# Altium PCB smarthalo_BRAIN_no_usb.PcbDoc
Units mil, origin at the board's own origin, x right, y up, seen from the top; angles counter-clockwise.
Board outline 2462 x 2461.7 mil, 2 copper layers (Top, Bottom), stack 61.902 mil thick; 84 components, 74 nets, 306 pads, 79 vias.
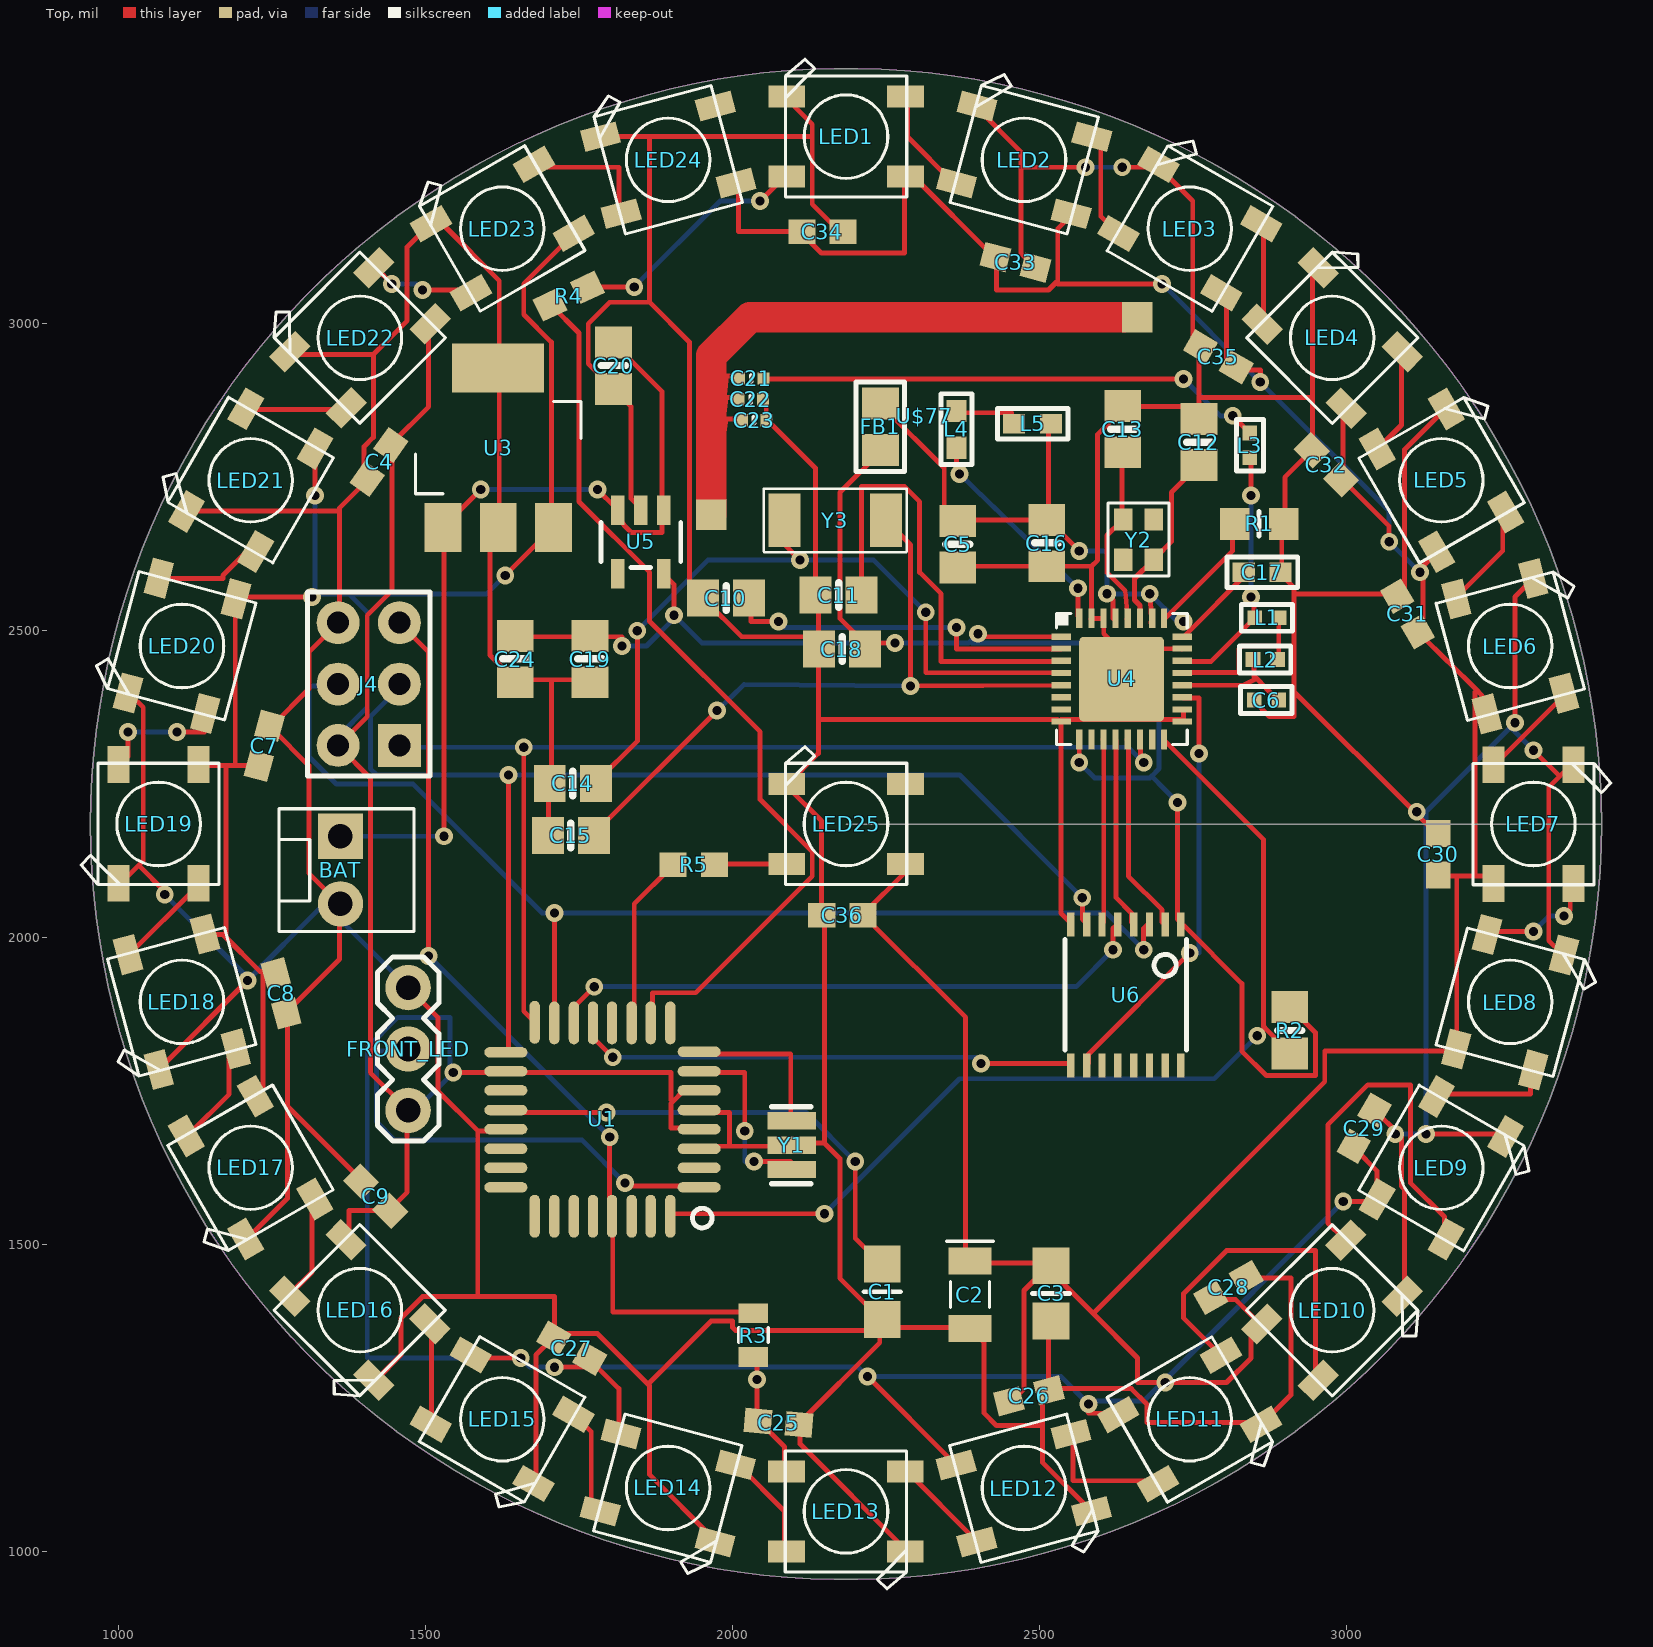
[diagram p0: Top view]
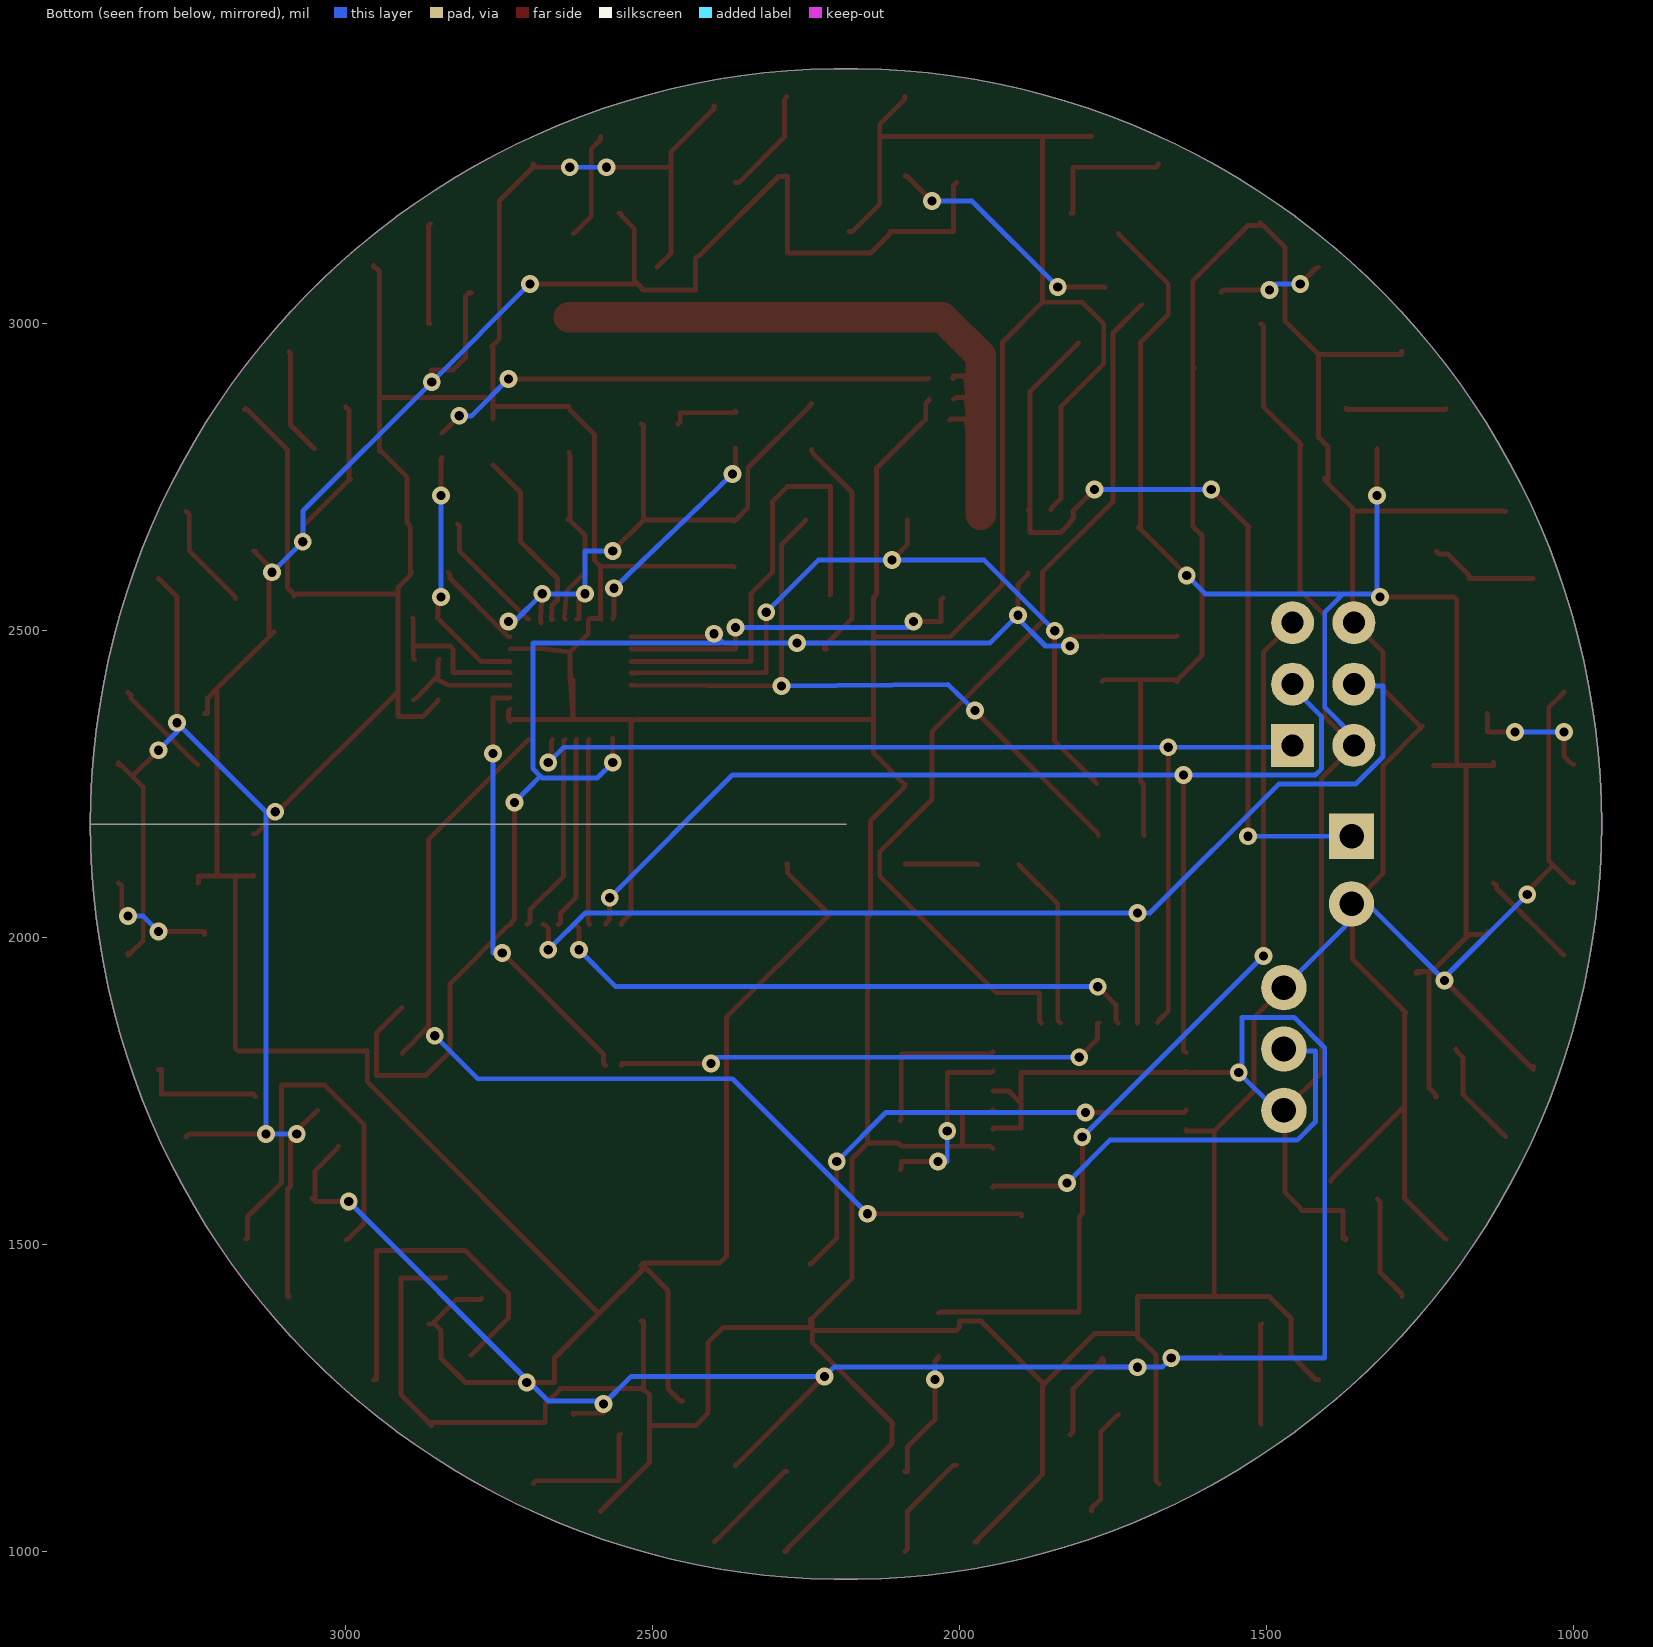
[diagram p1: Bottom view, seen from below]

## Layer stack, top to bottom
Top Solder: solder mask 0.4, Solder Resist, Dk 3.5
Top: signal copper 1.4016
Dielectric 1: core 59.0984, FR-4, Dk 4.8
Bottom: signal copper 1.4016
Bottom Solder: solder mask 0.4, Solder Resist, Dk 3.5

## Board outline
3416,2185 ccw(c2185,2185) 954,2185 ccw(c2185,2185) 2185,2185

## Design rules (kind name [scope] priority, off if disabled: settings)
Clearance mdViaVia [IsVia vs IsVia] p1: gap=6
Clearance mdPadVia [IsPad vs IsVia] p2: gap=6
Clearance mdPadPad [IsPad vs IsPad] p3: gap=6
Clearance mdWireVia [(InLayerClass('Signal Layers') AND IsTrack) vs IsVia] p4: gap=6
Clearance mdWirePad [(InLayerClass('Signal Layers') AND IsTrack) vs IsPad] p5: gap=6
Clearance mdWireWire [(InLayerClass('Signal Layers') AND IsTrack) vs (InLayerClass('Signal Layers') AND IsTrack)] p6: gap=6
Clearance [All] p7: gap=6
HoleSize [All] p1: absolutevalues=TRUE maxlimit=100000 minlimit=15 maxpercent=80.000 minpercent=20.000
HoleToHoleClearance [All] p1: gap=8 allowstackedmicrovias=TRUE
PolygonConnect ThermalVias [IsVia] p1: connectstyle=Direct reliefconductorwidth=10 reliefentries=4 polygonreliefangle="90 Angle" airgapwidth=10
PolygonConnect [All] p2: connectstyle=Relief reliefconductorwidth=10 reliefentries=4 polygonreliefangle="90 Angle" airgapwidth=10
RoutingVias [All] p1: holewidth=28 width=50 viastyle="Through Hole" minholewidth=28 minwidth=50 maxholewidth=28 maxwidth=50
SilkToSilkClearance [All] p1 off: silktosilkclearance=10
SilkToSolderMaskClearance [IsPad] p1 off: minsilkscreentomaskgap=10 clearancetoexposedcopper=TRUE
SolderMaskExpansion [All] p1: expansion=3
Width [All] p1: maxlimit=100000 minlimit=8 preferedwidth=10
26 further rules are at their usual default settings.

## Components (designator, comment, footprint, x,y, rotation, side; value= is the part's Value field where it differs from the comment)
BAT "" MOLEX-1X2_LOCK 1361.38,2159.8 r270 top
C1 "0.1uF" CAP0805-NP 2244,1467.91 r270 top
C2 "4.7uF" TAN-A 2387,1473.19 r270 top
C3 "0.1uF" CAP0805-NP 2519,1465.32 r270 top
C4 "" C0603 1424.37,2775 r235 top
C5 "0.1µF" 0805-NO 2367,2641 r270 top
C6 "2.2nF" _0402 2870,2387 r180 top
C7 "" C0603 1236.97,2312 r75 top
C8 "" C0603 1264.53,1909.41 r285 top
C9 "" C0603 1418.86,1578.7 r135 top
C10 "0.1uF" 0805-NO 1989.72,2553 r180 top
C11 "33nF" 0805-NO 2173.19,2558 r180 top
C12 "15pF" 0805-NO 2760,2807 r90 top
C13 "15pF" 0805-NO 2636,2828 r90 top
C14 "15pF" 0805-NO 1739.71,2251 r0 top
C15 "15pF" 0805-NO 1736.57,2166.5 r0 top
C16 "1µF" 0805-NO 2512,2643 r270 top
C17 "1nF" _0603 2863,2595 r0 top
C18 "0.1µF" 0805-NO 2178.7,2470 r180 top
C19 "10µF" 0805-NO 1768.07,2454 r270 top
C20 "10µF" 0805-NO 1806.26,2932 r270 top
C21 "1.8pF" _0402MP 2030.67,2911 r0 top
C22 "1.2pF" _0402MP 2029.88,2877 r180 top
C23 "1.5pF" _0402MP 2035.39,2843 r180 top
C24 "10µF" 0805-NO 1646.02,2454 r270 top
C25 "" C0603 2074.76,1209.41 r355 top
C26 "" C0603 2483,1253.5 r15 top
C27 "" C0603 1738.54,1330.67 r150 top
C28 "" C0603 2808,1429.88 r30 top
C29 "" C0603 3029,1688.94 r60 top
C30 "" C0603 3150,2135.39 r90 top
C31 "" C0603 3100,2527 r120 top
C32 "" C0603 2968,2770 r135 top
C33 "" C0603 2461,3100 r345 top
C34 "" C0603 2146.42,3150 r0 top
C35 "" C0603 2792,2946 r150 top
C36 "" C0603 2179.49,2036.18 r180 top
FB1 "MMZ1608B121C" 0805#1 2241,2832 r90 top
FRONT_LED "" 1X03 1471.61,1718.46 r90 top
J4 "" HEAD3X2 1457.44,2313 r90 top
L1 "8.2nH" _0402 2871,2521 r180 top
L2 "5.6nH" _0402 2868,2453 r180 top
L3 "3.9nH" _0402 2843,2802 r90 top
L4 "10µH" _0603 2365,2828 r90 top
L5 "15nH" _0603 2489,2837 r0 top
LED1 "" WS2812B 2185,3305 r0 top
LED2 "" WS2812B 2475,3267 r345 top
LED3 "" WS2812B 2745,3155 r330 top
LED4 "" WS2812B 2977,2977 r315 top
LED5 "" WS2812B 3155,2745 r300 top
LED6 "" WS2812B 3267,2475 r285 top
LED7 "" WS2812B 3305,2185 r270 top
LED8 "" WS2812B 3267,1895.12 r255 top
LED9 "" WS2812B 3155,1625 r240 top
LED10 "" WS2812B 2977,1393.04 r225 top
LED11 "" WS2812B 2745,1215.05 r210 top
LED12 "" WS2812B 2475,1103.16 r195 top
LED13 "" WS2812B 2185,1065 r180 top
LED14 "" WS2812B 1895.12,1103.16 r165 top
LED15 "" WS2812B 1625,1215.05 r150 top
LED16 "" WS2812B 1393.04,1393.04 r135 top
LED17 "" WS2812B 1215.05,1625 r120 top
LED18 "" WS2812B 1103.16,1895.12 r105 top
LED19 "" WS2812B 1065,2185 r90 top
LED20 "" WS2812B 1103.16,2475 r75 top
LED21 "" WS2812B 1215.05,2745 r60 top
LED22 "" WS2812B 1393.04,2977 r45 top
LED23 "" WS2812B 1625,3155 r30 top
LED24 "" WS2812B 1895.12,3267 r15 top
LED25 "" WS2812B 2185,2185 r0 top
R1 "22K" _0805MP 2858,2674 r0 top
R2 "10K" 0805-NO 2908,1848.56 r90 top
R3 "1k" 0805#2 2034.21,1352.72 r270 top
R4 "" 0603-NO 1733.03,3045 r25 top
R5 "" 0603-NO 1936.97,2118.86 r0 top
U1 "" QFP032 1945.77,1592.96 r90 top
U3 "UA78M05" SOT223 1528.31,2668 r0 top
U4 "" QFN32_5MM 2634,2421 r0 top
U5 "" SOT23-5 1850.75,2645 r180 top
U6 "74HC4050D" TSSOP16 2641,1906.65 r180 top
U$77 "" ANT_PCB_2.4GHZ_NRF8001_1.6MM_1OZ 1965.71,2689 r270 top
Y1 "16MHz" RESONATOR 2096.36,1661.49 r90 top
Y2 "16MHz" CRYSTAL_2.5X2 2662,2648 r90 top
Y3 "" CRYSTAL_4.9X1.8 2167.68,2680 r180 top

## Footprints (in the part's own frame and the unit in brackets; to place one, negate y for a bottom-side part, rotate by r counter-clockwise, add the part's x,y. Pads: shape width x height; smd on the part's side, far side on the other; paste and mask are expansions set on the pad)
1X03 [mil] "1X03"
  round 74 hole 40: 1(0,0) 2(100,0) 3(200,0)
  silkscreen extent -50,-50 250,50
0603-NO [mil] "0603-NO"
  rect 44x40 smd: 1(-33.46,0) 2(34,0)
0805#1 [mil] "0805"
  rect 52x60 smd: 1(-37.4,0) 2(38,0)
  silkscreen extent -73,-39 73,40
0805#2 [mil] "0805"
  rect 32x48 smd: 1(-35.43,0) 2(36,0)
  silkscreen extent -12,-24 12,24
0805-NO [mil] "0805-NO"
  rect 52x60 smd: 1(-37.4,0) 2(38,0)
  silkscreen extent 0,-20 0,20
_0402 [mil] "_0402"
  rect 24x24 smd: 1(-20,0) 2(20,0)
  silkscreen extent -42,-22 42,22
_0402MP [mil] "_0402MP"
  rect 20x20 smd: 1(-20,0) 2(20,0)
  silkscreen extent 0,-5 0,5
_0603 [mil] "_0603"
  rect 36x32 smd: 1(-30,0) 2(30,0)
  silkscreen extent -58,-25 58,25
_0805MP [mil] "_0805MP"
  rect 48x52 smd: 1(-40,0) 2(40,0)
  silkscreen extent 0,-20 0,20
ANT_PCB_2.4GHZ_NRF8001_1.6MM_1OZ [mil] "ANT_PCB_2.4GHZ_NRF8001_1.6MM_1OZ"
  rect 50x50 smd: FEED(0,0) TESTPOINT(-321.6,694)
  Top lines w50: 0,0 -259.4,0 -321.6,63 -321.6,671
C0603 [mil] "C0603"
  rect 44x40 smd: 1(-33.46,0) 2(34,0)
CAP0805-NP [mil] "CAP0805-NP"
  rect 60x60 smd: 1(0,0) 2(90,0)
  silkscreen extent 45,-30 45,30
CRYSTAL_2.5X2 [mil] "CRYSTAL_2.5X2"
  rect 36x30 smd: 1(-32.48,-24.61) 2(33,-24.61) 3(33,25) 4(-32.48,25)
  silkscreen extent -59,-49 60,50
CRYSTAL_4.9X1.8 [mil] "CRYSTAL_4.9X1.8"
  rect 52x87 smd: 1(-82.68,0) 2(83,0)
  silkscreen extent -116,-51 117,52
HEAD3X2 [mil] "HEAD3X2"
  rect 70x70 hole 36: 1(0,0)
  round 70 hole 36: 2(0,100) 3(100,0) 4(100,100) 5(200,0) 6(200,100)
  silkscreen extent -50,-50 250,150
MOLEX-1X2_LOCK [mil] "MOLEX-1X2_LOCK"
  rect 74x74 hole 40: 1(-5,0)
  round 74 hole 40: 2(105,0)
  silkscreen extent -50,-100 150,120
QFN32_5MM [mil] "QFN32_5MM"
  rect 32x10 smd: 1(-98.43,69) 2(-98.43,50) 3(-98.43,30) 4(-98.43,10) 5(-98.43,-9.84) 6(-98.43,-29.53) 7(-98.43,-49.21) 8(-98.43,-68.9) 17(99,-68.9) 18(99,-49.21) 19(99,-29.53) 20(99,-9.84) 21(99,10) 22(99,30) 23(99,50) 24(99,69)
  rect 10x32 smd: 9(-68.9,-98.43) 10(-49.21,-98.43) 11(-29.53,-98.43) 12(-9.84,-98.43) 13(10,-98.43) 14(30,-98.43) 15(50,-98.43) 16(69,-98.43) 25(69,99) 26(50,99) 27(30,99) 28(10,99) 29(-9.84,99) 30(-29.53,99) 31(-49.21,99) 32(-68.9,99)
  rrect10% 138x138 smd: 33(0,0)
  silkscreen extent -106,-106 107,107
QFP032 [mil] "QFP032"
  rrect100% 17x70 smd: 1(0,0) 2(32,0) 3(63,0) 4(95,0) 5(126,0) 6(158,0) 7(189,0) 8(221,0) 17(220,315) 18(189,315) 19(158,315) 20(126,315) 21(95,315) 22(63,315) 23(32,315) 24(0,315)
  rrect100% 70x17 smd: 9(268,47) 10(268,79) 11(268,110) 12(268,142) 13(268,173) 14(268,204) 15(268,236) 16(269,268) 25(-47,268) 26(-47,236) 27(-47,204) 28(-47,173) 29(-47,142) 30(-47,110) 31(-47,79) 32(-47,47)
  silkscreen extent -66,-21 -34,11
RESONATOR [mil] "RESONATOR"
  rect 28x79 smd: 1(-39.37,0) 2(0,0) 3(40,0)
  silkscreen extent -63,-31 63,32
SOT23-5 [mil] "SOT23-5"
  rect 22x48 smd: 1(-37.4,-51.18) 2(0,-51.18) 3(38,-51.18) 4(38,52) 5(-37.4,52)
  silkscreen extent -65,-31 65,42
SOT223 [mil] "SOT223"
  rect 60x80 smd: 1(0,0) 2(90,0) 3(180,0)
  rect 150x80 smd: 4(90,260)
  silkscreen extent -45,55 225,205
TAN-A [mil] "TAN-A"
  rect 44x70 smd: 1(0,0) 2(110,0)
  silkscreen extent -32,-38 76,38
TSSOP16 [mil] "TSSOP16"
  rect 12x39 smd: 1(-89.57,-114.87) 2(-63.98,-114.87) 3(-38.39,-114.87) 4(-12.8,-114.87) 5(13,-114.87) 6(39,-114.87) 7(64,-114.87) 8(90,-114.87) 9(90,115) 10(64,115) 11(39,115) 12(13,115) 13(-12.8,115) 14(-38.39,115) 15(-63.98,115) 16(-89.57,115)
  silkscreen extent -99,-90 99,90
WS2812B [mil] "WS2812B"
  rect 60x36 smd: 1-VDD(97,-64.96) 2-DOUT(97,65) 3-GND(-96.46,65) 4-DIN(-96.46,-64.96)
  silkscreen extent -98,-98 99,126

## Part data
BAT: library part MOLEX-1X2_LOCK
C1 C3: library part CAP0805-NP
C2: library part TAN-A
C4 C7 C8 C9 C25 C26 C27 C28 C29 C30 C31 C32 C33 C34 C35 C36: library part C0603
C5 C10 C11 C12 C13 C14 C15 C16 C18 C19 C20 C24 R2: library part 0805-NO
C6 L1 L2 L3: library part _0402
C17 L4 L5: library part _0603
C21 C22 C23: library part _0402MP
FB1 R3: library part 0805
FRONT_LED: library part 1X03
J4: library part HEAD3X2
LED1 LED2 LED3 LED4 LED5 LED6 LED7 LED8 LED9 LED10 LED11 LED12 LED13 LED14 LED15 LED16 LED17 LED18 LED19 LED20 LED21 LED22 LED23 LED24 LED25: library part WS2812B
R1: library part _0805MP
R4 R5: library part 0603-NO
U1: library part QFP032
U3: library part SOT223
U4: library part QFN32_5MM
U5: library part SOT23-5
U6: library part TSSOP16
U$77: library part ANT_PCB_2.4GHZ_NRF8001_1.6MM_1OZ
Y1: library part RESONATOR
Y2: library part CRYSTAL_2.5X2
Y3: library part CRYSTAL_4.9X1.8

## Via types
v1: diameter 29/29 (per signal layer), hole 15, Top to Bottom, 79 vias

## Nets (pads, with @x,y where several pads share a name; then routed paths per layer and width w, separated by ;. In a path a pad name is that pad's centre, name@x,y a point inside that pad or via, vN(x,y) a via of type N, cw(c..) or ccw(c..) an arc to the next point about the centre after c; other vN are vias at no path point)
+5V: C2.1 C3.1 C4.1 C7.1 C8.1 C9.1 C25.1 C26.1 C27.1 C28.1 C29.1 C30.1 C31.1 C32.1 C33.1 C34.1 C35.1 C36.1 FRONT_LED.1 J4.2 LED1.1-VDD LED2.1-VDD LED3.1-VDD LED4.1-VDD LED5.1-VDD LED6.1-VDD LED7.1-VDD LED8.1-VDD LED9.1-VDD LED10.1-VDD LED11.1-VDD LED12.1-VDD LED13.1-VDD LED14.1-VDD LED15.1-VDD LED16.1-VDD LED17.1-VDD LED18.1-VDD LED19.1-VDD LED20.1-VDD LED21.1-VDD LED22.1-VDD LED23.1-VDD LED24.1-VDD LED25.1-VDD R3.2 U1.4 U1.6 U1.18 U3.3 | length 14313.8
  Top w8: LED19.1-VDD@1130,2285 LED19.1-VDD 1130,2280 1175,2280 ; LED18.1-VDD@1140,2010 1140.95,2005.11 1145,2005 1170,2005 1172.5,2002.5 ; LED17.1-VDD@1225,1740 1223.08,1741.01 1225,1745 1235,1755 C8.1@1235,1945 ; C7.1@1228.31,2280 1225,2280 1190,2280 ; v1(1315,2555) 1195,2555 1190.88,2552 1190,2550 1190,2280 ; LED21.1-VDD@1319.54,2797 1320,2795 v1(1320,2720) ; LED16.1-VDD@1370,1510 1370.77,1507.18 1375,1510 1375,1555 1440,1555 C9.1 1445,1560 1470,1585 1470,1715 FRONT_LED.1 1470,1720 1410,1780 1410,2260 1360,2310 J4.2 1360,2315 1405,2360 1405,2525 1445,2565 1445,2800 1443.56,2803 1445,2805 1505,2865 1505,2995 1507.18,3000 LED22.1-VDD@1510,3000 ; v1(1545,1780) 1630,1780 1630.93,1781.86 1635,1780 1900,1780 1900,1735 1902.5,1732.5 ; LED15.1-VDD@1575,1320 1573.95,1319.54 1575,1315 v1(1655,1315) ; v1(1630,2590) 1705,2665 U3.3 1705,2670 1705,2970 1660,3015 1660,3065 1740,3145 LED23.1-VDD@1741.01,3147 ; v1(1710,1300) 1765,1300 1765,1310 C27.1 1770,1310 1815,1265 1815,1195 1818.77,1190.88 LED14.1-VDD@1820,1190 ; U1.4@1945.77,1687.4 1945,1690 1900,1690 1900,1730 1902.5,1732.5 ; U1.6@1945.77,1750.38 1945,1750 1920,1750 1902.5,1732.5 ; LED24.1-VDD@2005,3230 2005.11,3230 2010,3225 2010,3150 2110,3150 C34.1 2115,3145 2145,3115 2280,3115 2280,3240 2282,3241 2285,3240 2295,3240 2425,3110 2429,3109 2430,3105 2430,3055 2515,3055 2528,3068 ; R3.2@2034.21,1317.28 2035,1315 2040,1310 v1(2040,1280) 2040,1215 C25.1 2045,1210 2085,1170 2085,1130 2088.54,1129.96 LED13.1-VDD@2090,1130 ; v1(2220,1285) 2360,1145 2365,1140.95 LED12.1-VDD@2365,1140 ; LED25.1-VDD 2280,2120 2280,2105 2215,2040 C36.1 2215,2035 2380,1870 2380,1480 2385,1475 C2.1 2390,1470 2515,1470 C3.1 ; C26.1@2451,1244.84 2455,1245 2475,1265 2475,1425 2515,1465 C3.1 ; LED2.1-VDD@2555,3180 2552,3180 2550,3175 2530,3155 2530,3070 2528,3068 ; v1(2580,1240) 2580,1225 2625,1225 2629,1223.08 LED11.1-VDD@2630,1225 ; v1(2700,3065) 2530,3065 2528,3068 ; C28.1 2780,1410 2820,1410 2860,1370 LED10.1-VDD@2863,1370.77 ; LED3.1-VDD@2795,3050 2797,3051 2800,3050 2805,3045 2805,2945 2820,2930 2821,2929 2825,2925 2860,2925 v1(2860,2905) ; LED10.1-VDD@2865,1370 LED10.1-VDD@2863,1370.77 ; v1(2995,1570) 3050,1570 LED9.1-VDD@3051,1573.95 ; LED4.1-VDD@3000,2865 3000,2863 2995,2860 2995,2750 2992,2746 2995,2745 3070,2670 v1(3070,2645) ; C29.1@3012,1659.96 3015,1655 3050,1620 3050,1575 LED9.1-VDD@3051,1573.95 ; LED9.1-VDD@3055,1575 LED9.1-VDD@3051,1573.95 ; v1(3120,2595) v1@3125,2595 ; C30.1 3150,2100 3180,2100 ; LED5.1-VDD@3150,2630 3147,2629 3145,2625 3125,2605 v1@3125,2595 ; LED6.1-VDD@3230,2365 3225,2365 3225,2390 3213,2403 ; LED7.1-VDD@3241,2088.54 3240,2090 3240,2100 3210,2100 ; 1172.5,2002.5 1230,1945 C8.1@1235,1945 ; 1172.5,2002.5 1175,2005 1175,2280 ; 1175,2280 1190,2280 ; C8.1@1235,1945 1255,1945 C8.1 C8.1@1235,1945 ; C3.1 2515,1460 2588,1387.5 ; 2588,1387.5 2660,1315 2660,1275 v1(2705,1275) 2805,1275 2845,1315 2845,1360 2855,1370 LED10.1-VDD@2863,1370.77 ; 2588,1387.5 2965,1765 2965,1815 3175,1815 3180,1818.77 3180,1820 3180,2100 ; v1@3125,2595 3125,2495 3117,2498 3120,2495 3213,2403 ; 3180,2100 3210,2100 ; 3210,2100 3210,2400 3213,2403
  Bottom w8: v1(1315,2555) v1@1320,2560 ; v1(1320,2720) v1@1320,2560 ; J4.2 1360,2315 1360,2330 1405,2375 1405,2530 1377.5,2558 ; FRONT_LED.1 1475,1720 1485,1720 v1(1545,1780) 1540,1780 1540,1870 1455,1870 1405,1820 1405,1315 v1(1655,1315) 1670,1300 v1(1710,1300) 2040,1300 ; v1(1630,2590) 1600,2560 1380,2560 1377.5,2558 ; v1(2040,1280) 2040,1300 ; v1(2700,3065) v1(2860,2905) 3070,2695 v1(3070,2645) v1(3120,2595) ; v1(2705,1275) v1@2703,1277.5 ; v1(2995,1570) v1@2703,1277.5 ; v1@1320,2560 1375,2560 1377.5,2558 ; 2040,1300 2205,1300 v1(2220,1285) 2535,1285 v1(2580,1240) 2580,1245 2670,1245 v1@2703,1277.5
A0: U1.23
A1: U1.24
A2: U1.25
A3: U1.26
A4: U1.27
A5: U1.28
A6: U1.19
A7: U1.22
ACTIVE: U4.6
AREF: C1.1 U1.20 | length 789.8
  Top w8: U1.20@1630.93,1718.89 1635,1715 v1(1795,1715) ; v1(2200,1635) 2200,1510 2240,1470 C1.1
  Bottom w8: v1(1795,1715) 2120,1715 v1(2200,1635)
AVDD: C5.1 C16.1 C17.1 FB1.2 L5.2 U4.24 U4.26 U4.29 | length 1144.1
  Top w8: FB1.2 2245,2865 2345,2765 2345,2700 2365,2680 2367,2678 2370,2680 2510,2680 C16.1@2512,2681 ; L5.2 2515,2835 2515,2685 C16.1@2512,2681 ; v1(2565,2630) 2515,2680 C16.1@2512,2681 ; v1(2610,2560) 2620,2550 2620,2520 U4.29@2624,2519 ; v1(2680,2560) 2683,2520 2683,2519 U4.26@2682,2512 ; U4.24@2732,2490 2735,2490 2748,2503 ; v1(2735,2515) 2748,2503 ; C17.1 2830,2590 2830,2585 2748,2503
  Bottom w8: v1(2565,2630) 2610,2630 v1(2610,2560) v1(2680,2560) 2725,2515 v1(2735,2515)
CALL: U1.9
D4: U1.2
D7: R5.1 U1.11 | length 285.9
  Top w8: U1.11 1840,1865 1840,2055 1900,2115 R5.1
D8: U1.12
FRONT_LED: FRONT_LED.2 U1.1 | length 742.4
  Top w8: v1(1825,1600) 1825,1595 1945,1595 U1.1
  Bottom w8: FRONT_LED.2 1470,1815 1420,1815 1420,1700 1450,1670 1755,1670 v1(1825,1600)
GND: BAT.2 C1.2 C2.2 C3.2 C4.2 C5.2 C6.2 C7.2 C8.2 C9.2 C10.2 C11.2 C12.2 C13.2 C14.1 C15.1 C16.2 C17.2 C18.2 C19.2 C20.2 C22.1 C23.1 C24.2 C25.2 C26.2 C27.2 C28.2 C29.2 C30.2 C31.2 C32.2 C33.2 C34.2 C35.2 C36.2 FRONT_LED.3 J4.6 LED1.3-GND LED2.3-GND LED3.3-GND LED4.3-GND LED5.3-GND LED6.3-GND LED7.3-GND LED8.3-GND LED9.3-GND LED10.3-GND LED11.3-GND LED12.3-GND LED13.3-GND LED14.3-GND LED15.3-GND LED16.3-GND LED17.3-GND LED18.3-GND LED19.3-GND LED20.3-GND LED21.3-GND LED22.3-GND LED23.3-GND LED24.3-GND LED25.3-GND R1.2 U1.3 U1.5 U1.21 U3.2 U3.4 U4.8 U4.17 U4.18 U4.23 U4.30 U4.31 U4.33 U5.2 U6.8 Y1.2 | length 20083.1
  Top w8: LED19.3-GND@1000,2090 LED19.3-GND 1005,2090 1032.5,2117.5 ; LED20.3-GND@1015,2400 1015.45,2399 1020,2395 1040,2375 1040,2125 1032.5,2117.5 ; LED18.3-GND@1065,1790 1065.38,1785.14 1070,1790 v1(1210,1930) ; v1(1075,2070) 1075,2075 1032.5,2117.5 ; LED21.3-GND@1110.57,2694 1115,2695 1360,2695 ; LED17.3-GND 1210,1510 1275,1575 1275,1720 1277.5,1722.5 ; LED22.3-GND@1280,2955 1278.9,2955 1280,2950 1415,2950 ; C9.2@1395.2,1602.36 1395,1605 1277.5,1722.5 ; LED16.3-GND@1415,1280 LED16.3-GND 1420,1280 1460,1320 1460,1380 1495,1415 1585,1415 ; FRONT_LED.3 1475,1915 1520,1870 1520,1750 1585,1685 ; LED23.3-GND@1510,3165 LED23.3-GND@1508.99,3163 ; U1.21@1630.93,1687.4 1630,1685 1585,1685 ; LED15.3-GND@1675,1110 1676.05,1110.57 1680,1115 1680,1320 1705,1345 C27.2@1709.56,1347.4 ; C15.1 1700,2170 1700,2250 C14.1 1705,2255 1705,2420 ; C19.2@1768.07,2417 1765,2420 1705,2420 ; LED24.3-GND@1785,3305 1785.14,3305 1790,3305 1865,3305 ; U5.2@1850.75,2697 1850,2700 1835,2715 1835,2865 1810,2890 C20.2 1805,2895 1765,2935 1765,3000 1800,3035 1865,3035 ; U1.3@1945.77,1655.92 1950,1660 1995,1660 ; U1.5@1945.77,1718.89 1950,1715 1995,1715 1995,1660 ; LED14.3-GND@1975,1015 1971.48,1015.45 1970,1020 1865,1125 1865,1270 1862.5,1272.5 ; C22.1 2050,2875 2055,2870 2055,2845 C23.1 2060,2840 2135,2765 2135,2560 2135.79,2558 2140,2555 C18.2@2140,2490 ; LED1.3-GND@2090,3370 LED1.3-GND 2090,3365 2130,3325 2130,3305 ; C34.2@2179.88,3150 2175,3150 2130,3195 2130,3305 ; LED13.3-GND@2285,1000 2282,1000.04 2280,1005 2110,1175 2110,1205 2108.1,1206.49 2110,1210 2240,1340 C1.2@2240,1360 ; C5.2@2367,2604 2370,2605 2510,2605 2512,2606 2515,2605 2585,2605 ; LED2.3-GND@2400,3355 2399,3355 2400,3350 2470,3280 2470,3255 ; C33.2@2493,3092 2490,3095 2470,3115 2470,3255 ; C3.2 2515,1375 C26.2@2515,1265 ; U6.8 2550,2025 2535,2040 2535,2350 U4.8@2535,2352 ; v1(2575,3255) 2470,3255 ; U4.31@2584,2519 U4.31@2585,2520 ; LED12.3-GND@2585,1065 2585,1065.38 2580,1070 2505,1145 2505,1205 ; v1(2635,3255) 2690,3255 LED3.3-GND@2694,3260 ; LED3.3-GND@2695,3260 LED3.3-GND@2694,3260 ; U4.18@2732,2372 2735,2370 2735,2355 2732,2352 2730,2355 U4.33@2630,2355 ; U4.23@2732,2470 2683,2471 U4.33@2635,2465 ; C28.2@2837,1446.61 2840,1445 2910,1445 2910,1255 2865,1210 LED11.3-GND@2862,1207.02 ; C6.2 2850,2385 2875,2360 2915,2360 2915,2400 ; LED11.3-GND@2860,1205 LED11.3-GND@2862,1207.02 ; LED4.3-GND@2955,3095 2955,3092 2950,3090 2945,3085 2945,2880 ; C29.2@3046,1717.92 3050,1715 v1@3083,1682.5 ; v1(3080,1680) v1@3083,1682.5 ; LED10.3-GND@3095,1415 3092,1415.31 3095,1420 3095,1590 3090,1595 3090,1675 v1@3083,1682.5 ; v1(3115,2205) v1@3113,2203 ; v1(3130,1680) 3255,1680 3260,1676.05 LED9.3-GND@3260,1675 ; C30.2@3150,2168.86 3145,2170 v1@3113,2203 ; LED5.3-GND@3165,2860 3163,2862 3160,2860 3095,2795 3095,2570 3085,2560 3084,2556 3080,2560 2915,2560 ; v1(3275,2350) 3275,2555 3300,2580 LED6.3-GND@3305,2585 ; v1(3305,2305) 3348,2263 ; LED8.3-GND@3355,1975 3355,1971.48 3350,1975 3330,1995 3330,2245 3348,2263 ; LED7.3-GND@3370,2285 3370,2282 3365,2280 3348,2263 ; 1277.5,1722.5 1275,1725 1275,1875 1273.19,1877.09 1275,1880 1360,1965 1360,2050 BAT.2 1360,2055 1310,2105 1310,2280 1250,2340 1245.63,2345 1250,2345 1310,2405 1310,2465 1355,2510 J4.6 1360,2515 1360,2695 ; 1360,2695 1360,2700 1405,2745 1405.18,2748 1400,2745 1400,2800 1415,2815 1415,2950 ; 1415,2950 1470,3005 1470,3125 1505,3160 LED23.3-GND@1508.99,3163 ; LED23.3-GND@1508.99,3163 1510,3160 1530,3160 1620,3070 1620,2930 U3.4 1620,2925 1620,2670 U3.2 1615,2665 1605,2655 1605,2460 1645,2420 1646.02,2417 1650,2420 1705,2420 ; 1585,1415 1710,1415 C27.2@1710,1355 ; 1585,1415 1585,1685 ; C27.2@1709.56,1347.4 1710,1350 C27.2@1710,1355 ; C27.2@1709.56,1347.4 C27.2@1710,1355 ; C27.2@1710,1355 1780,1355 1862.5,1272.5 ; 1862.5,1272.5 1965,1375 2000,1375 2000,1365 2005,1360 C1.2@2240,1360 ; 1865,3035 1865,3305 ; 1865,3035 1930,2970 1930,2575 1950,2555 1952.32,2553 1955,2550 2015,2490 C18.2@2140,2490 ; 1865,3305 2130,3305 ; 1995,1660 2095,1660 Y1.2 2100,1665 2150,1665 ; 2140,2355 2140,2465 C18.2@2141.3,2470 ; 2140,2355 2140,2300 2090,2250 LED25.3-GND 2090,2245 2145,2190 2145,2040 2146.02,2036.18 2150,2035 2150,1665 ; 2140,2355 2530,2355 U4.8@2535,2352 ; C18.2@2140,2490 2140,2470 C18.2@2141.3,2470 ; C18.2@2140,2490 C18.2@2141.3,2470 ; 2150,1665 2175,1640 2175,1445 2240,1380 C1.2 ; C1.2@2240,1360 C1.2@2240,1365 ; C1.2@2240,1360 C1.2 ; C1.2@2240,1365 2240,1375 C1.2 ; C1.2@2240,1365 2385,1365 C2.2 2390,1360 2410,1340 2410,1225 2430,1205 2505,1205 ; C1.2@2240,1365 C1.2 ; 2505,1205 2505,1255 2510,1260 2515,1262.17 C26.2@2515,1265 ; C26.2@2515,1265 2650,1265 2675,1240 2675,1210 2860,1210 LED11.3-GND@2862,1207.02 ; U4.8@2535,2352 2535,2355 U4.33@2630,2355 ; U4.31@2585,2520 2600,2520 2604,2519 2605,2515 2605,2495 U4.33@2635,2465 ; U4.31@2585,2520 2585,2605 ; 2585,2605 2595,2615 2595,2820 2635,2860 2636,2865 2640,2865 C12.2@2760,2865 ; U4.33@2630,2355 2630,2420 U4.33 ; U4.33@2630,2355 U4.33 ; U4.33 2635,2425 U4.33@2635,2465 ; U4.33 U4.33@2635,2465 ; LED3.3-GND@2694,3260 2695,3255 2750,3200 2750,2975 2760,2965 2763,2963 2760,2960 2760,2880 ; C12.2@2760,2865 C12.2 C12.2@2760,2865 ; C12.2@2760,2865 2760,2880 ; 2760,2880 2945,2880 ; 2915,2400 2915,2560 ; 2915,2400 v1@3113,2203 ; 2915,2560 2915,2570 2895,2590 C17.2 2895,2595 2895,2670 R1.2 2900,2675 2900,2750 2940,2790 2945,2793 2945,2795 2945,2880
  Bottom w8: v1(1075,2070) 1210,1935 v1(1210,1930) 1330,2050 BAT.2@1340,2050 ; FRONT_LED.3 1470,1920 BAT.2@1340,2050 ; v1(2575,3255) v1(2635,3255) ; v1(3080,1680) v1(3130,1680) 3130,2205 ; v1(3115,2205) 3130,2205 ; v1(3305,2305) 3270,2340 v1(3275,2350) 3130,2205 ; BAT.2@1340,2050 1360,2050 BAT.2 BAT.2@1340,2050
HALO: R4.1 U1.10 | length 1497.4
  Top w8: R4.1@1702.7,3031 1705,3030 1750,2985 1750,2710 1865,2595 1865,2515 2045,2335 2045,2225 2130,2140 2130,2100 1940,1910 1870,1910 1870,1865 U1.10
MISO: J4.1 U1.16 U4.14 | length 1720.9
  Top w8: v1(1660,2310) 1660,1880 1675,1865 U1.16@1677.93,1861.29 ; U4.14@2663,2323 2665,2320 2665,2290 v1(2670,2285)
  Bottom w8: J4.1 1460,2310 v1(1660,2310) 2645,2310 v1(2670,2285)
MOSI: U4.13 U6.2 | length 327.5
  Top w8: U4.13@2643,2323 2645,2320 2645,2100 2700,2045 2700,2025 U6.2
MOSI_5V: J4.4 U1.15 U6.3 | length 1879.7
  Top w8: U1.15 1710,1865 v1(1710,2040) ; v1(2670,1980) 2670,2015 2675,2020 U6.3@2679,2021.53
  Bottom w8: J4.4 1355,2410 1310,2410 1310,2295 1355,2250 1480,2250 1690,2040 v1(1710,2040) 2610,2040 v1(2670,1980)
N$1: U1.8 Y1.3 | length 259.8
  Top w8: U1.8@1945.77,1813.34 1950,1810 2095,1810 2095,1705 Y1.3@2096.36,1700.86
N$2: U1.7 Y1.1 | length 307.8
  Top w8: U1.7@1945.77,1781.86 1950,1780 2020,1780 v1(2020,1685) ; v1(2035,1635) 2095,1635 2095,1625 Y1.1
  Bottom w8: v1(2020,1685) 2020,1635 v1(2035,1635)
N$3: LED1.2-DOUT LED2.4-DIN | length 176.9
  Top w8: LED1.2-DOUT 2285,3365 2285,3305 2360,3230 LED2.4-DIN@2365,3230
N$4: LED2.2-DOUT LED3.4-DIN | length 176.6
  Top w8: LED2.2-DOUT@2585,3305 2585,3300 2600,3285 2600,3175 2625,3150 LED3.4-DIN
N$5: LED3.2-DOUT LED4.4-DIN | length 166.2
  Top w8: LED3.2-DOUT@2862,3163 2865,3160 2865,3000 LED4.4-DIN@2863,3000
N$6: LED4.2-DOUT LED5.4-DIN | length 174.9
  Top w8: LED5.4-DIN@3051,2797 3055,2800 3090,2835 3090,2950 LED4.2-DOUT@3092,2955
N$7: LED5.2-DOUT LED6.4-DIN | length 175.5
  Top w8: LED6.4-DIN@3180,2552 3180,2555 3255,2630 3255,2690 LED5.2-DOUT@3260,2694
N$8: LED6.2-DOUT LED7.4-DIN | length 164.9
  Top w8: LED7.4-DIN@3241,2282 3245,2285 3350,2390 3350,2395 LED6.2-DOUT@3355,2399
N$9: LED7.2-DOUT LED8.4-DIN | length 200.5
  Top w8: LED8.4-DIN@3230,2005.11 3230,2010 v1(3305,2010) ; v1(3355,2035) 3365,2045 3365,2085 LED7.2-DOUT@3370,2088.54
  Bottom w8: v1(3305,2010) 3330,2035 v1(3355,2035)
N$10: LED8.2-DOUT LED9.4-DIN | length 200
  Top w8: LED9.4-DIN 3150,1745 3300,1745 3300,1785 LED8.2-DOUT@3305,1785.14
N$11: LED9.2-DOUT LED10.4-DIN | length 639
  Top w8: LED10.4-DIN@3000,1507.18 2995,1510 2970,1535 2970,1695 3035,1760 3105,1760 3105,1600 3160,1545 3160,1510 LED9.2-DOUT@3163,1508.99
N$12: LED10.2-DOUT LED11.4-DIN | length 586
  Top w8: LED11.4-DIN@2797,1319.54 2795,1320 2735,1380 2735,1420 2805,1490 2950,1490 2950,1280 LED10.2-DOUT@2955,1278.9
N$13: LED11.2-DOUT LED12.4-DIN | length 219.1
  Top w8: LED12.4-DIN@2552,1190.88 2555,1190 2555,1115 2690,1115 LED11.2-DOUT@2694,1110.57
N$14: LED12.2-DOUT LED13.4-DIN | length 164.6
  Top w8: LED13.4-DIN@2282,1129.96 2285,1130 2395,1020 LED12.2-DOUT@2399,1015.45
N$15: LED13.2-DOUT LED14.4-DIN | length 177.1
  Top w8: LED14.4-DIN 2010,1140 2085,1065 2085,1005 LED13.2-DOUT@2088.54,1000.04
N$16: LED14.2-DOUT LED15.4-DIN | length 176.2
  Top w8: LED15.4-DIN 1745,1220 1770,1195 1770,1085 1785,1070 LED14.2-DOUT@1785.14,1065.38
N$17: LED15.2-DOUT LED16.4-DIN | length 166.1
  Top w8: LED16.4-DIN 1510,1370 1510,1210 LED15.2-DOUT@1508.99,1207.02
N$18: LED16.2-DOUT LED17.4-DIN | length 175.3
  Top w8: LED16.2-DOUT@1278.9,1415.31 1280,1420 1315,1455 1315,1570 LED17.4-DIN
N$19: LED17.2-DOUT LED18.4-DIN | length 175.9
  Top w8: LED17.2-DOUT@1110.57,1676.05 1115,1680 1180,1745 1180,1805 1190,1815 LED18.4-DIN
N$20: LED18.2-DOUT LED19.4-DIN | length 165.3
  Top w8: LED18.2-DOUT@1015.45,1971.48 1020,1975 1125,2080 1125,2085 LED19.4-DIN
N$21: LED19.2-DOUT LED20.4-DIN | length 215
  Top w8: LED19.2-DOUT 1005,2285 1015,2295 v1(1015,2335) ; v1(1095,2335) 1140,2335 1140,2360 LED20.4-DIN
  Bottom w8: v1(1015,2335) v1(1095,2335)
N$22: LED20.2-DOUT LED21.4-DIN | length 179.2
  Top w8: LED20.2-DOUT@1065.38,2585 1070,2585 1170,2585 1170,2590 1205,2625 1220,2625 LED21.4-DIN
N$23: LED21.2-DOUT LED22.4-DIN | length 166.7
  Top w8: LED21.2-DOUT@1207.02,2862 1210,2860 1370,2860 LED22.4-DIN@1370.77,2863
N$24: LED22.2-DOUT LED23.4-DIN | length 175.2
  Top w8: LED22.2-DOUT@1415.31,3092 1420,3090 v1(1445,3065) ; v1(1495,3055) 1570,3055 LED23.4-DIN@1573.95,3051
  Bottom w8: v1(1445,3065) 1485,3065 v1(1495,3055)
N$25: LED23.2-DOUT LED24.4-DIN | length 220.1
  Top w8: LED23.2-DOUT@1676.05,3260 1680,3255 1815,3255 1815,3180 LED24.4-DIN@1818.77,3180
N$26: LED25.2-DOUT
N$27: LED25.4-DIN R5.2 | length 118.3
  Top w8: R5.2@1970.43,2118.86 1975,2120 2085,2120 LED25.4-DIN
N$28: C6.1 L2.2 U4.20 | length 208.4
  Top w8: U4.20@2732,2411 2733,2411 2832,2411 2850,2420 2853,2423 ; L2.2 2850,2450 2850,2425 2853,2423 ; C6.1 2885,2390 2853,2423
N$29: C11.1 U4.3 | length 752.1
  Top w8: C11.1@2211,2558 2210,2560 2210,2735 2280,2735 2305,2710 2305,2595 2340,2560 2340,2450 2530,2450 U4.3@2535,2450
N$30: C10.1 U4.2 | length 583.3
  Top w8: C10.1 2030,2550 2030,2515 v1(2075,2515) ; v1(2365,2505) 2365,2470 2530,2470 U4.2@2535,2470
  Bottom w8: v1(2075,2515) 2085,2505 v1(2365,2505)
N$31: C13.1 U4.28 Y2.3 | length 297.5
  Top w8: C13.1@2636,2790 2635,2785 2635,2685 2638,2681 2635,2680 2610,2655 2610,2595 2640,2565 2644,2521 U4.28@2643,2519
N$32: C12.1 U4.27 Y2.1 | length 303.2
  Top w8: U4.27@2663,2519 2665,2517 2664,2541 2655,2550 2655,2585 2685,2615 2687,2616 2690,2620 2715,2645 2715,2725 2755,2765 C12.1@2760,2770
N$33: C14.2 U4.4 Y3.2 | length 1223.1
  Top w8: C14.2@1777.11,2251 1780,2255 1845,2320 v1(1845,2500) ; Y3.2@2085,2680 2085,2640 v1(2110,2615) ; v1(2315,2530) 2315,2432 2529,2431 U4.4@2535,2431
  Bottom w8: v1(1845,2500) 1960,2615 v1(2110,2615) 2230,2615 v1(2315,2530)
N$34: C15.2 U4.5 Y3.1 | length 1149.3
  Top w8: C15.2@1773.98,2166.5 1775,2170 v1(1975,2370) ; Y3.1@2251,2680 2255,2675 2290,2640 v1(2290,2410) 2529,2411 U4.5@2535,2411
  Bottom w8: v1(1975,2370) 2018.68,2412 v1(2290,2410)
N$35: L4.1 U4.32 | length 363.5
  Top w8: L4.1 2365,2795 2365,2760 v1(2370,2755) ; v1(2563,2569) 2563,2524 U4.32@2565,2519
  Bottom w8: v1(2370,2755) v1(2563,2569)
N$36: R1.1 U4.25 | length 203.7
  Top w8: U4.25@2702,2519 2705,2520 2815,2630 2815,2670 R1.1
N$37: L4.2 L5.1 | length 113
  Top w8: L4.2 2365,2855 2455,2855 2455,2840 L5.1
N$38: L1.2 L3.1 U4.22 | length 412.4
  Top w8: U4.22@2732,2450 2735,2450 2780,2450 L1.2 2850,2525 2850,2550 v1(2845,2555) ; L3.1 2845,2780 v1(2845,2720)
  Bottom w8: v1(2845,2555) v1(2845,2720)
N$39: L1.1 L2.1 U4.21 | length 267.4
  Top w8: U4.21@2732,2431 2736,2432 2825,2432 2825,2470 2830,2475 2890,2475 ; L2.1 2890,2455 2890,2475 ; L1.1 2890,2520 2890,2475
N$40: C21.2 L3.2 | length 828.9
  Top w8: C21.2 2055,2910 v1(2735,2910) ; v1(2815,2850) 2840,2825 L3.2
  Bottom w8: v1(2735,2910) 2795,2850 v1(2815,2850)
N$41: C21.1 C22.2 C23.2 U$77.FEED | length 649.5
  Top w8: C22.2 2005,2880 1990,2880 U$77.FEED ; C21.1 2010,2915 1990,2915 U$77.FEED ; C23.2 2015,2845 1990,2845 U$77.FEED
N$42: LED1.4-DIN R4.2 | length 400.2
  Top w8: R4.2@1763.36,3059 1765,3060 v1(1840,3060) ; v1(2045,3200) 2085,3240 LED1.4-DIN@2088.54,3241
  Bottom w8: v1(1840,3060) 1980,3200 v1(2045,3200)
RDYN: R2.1 U1.32 U4.16 | length 1694.4
  Top w8: U1.32 1900,1550 v1(2150,1550) ; U4.16@2702,2323 2705,2320 2865,2160 2865,1855 2868,1852.5 ; v1(2855,1840) 2868,1852.5 ; R2.1 2905,1815 2868,1852.5
  Bottom w8: v1(2150,1550) 2370,1770 2785,1770 v1(2855,1840)
REQN: U4.12 U6.4 | length 313.8
  Top w8: U4.12@2624,2323 2625,2320 2625,2065 2650,2040 2650,2025 U6.4@2654,2021.53
REQN_5V: U1.14 U6.5 | length 987.9
  Top w8: U1.14 1745,1865 1745,1890 v1(1775,1920) ; v1(2620,1980) 2620,2015 2625,2020 U6.5
  Bottom w8: v1(1775,1920) 2560,1920 v1(2620,1980)
RESET: U4.19 U6.10 | length 710.9
  Top w8: U6.10@2577,1791.78 2580,1795 2580,1810 v1(2745,1975) ; U4.19@2732,2391 2735,2390 2760,2390 v1(2760,2300)
  Bottom w8: v1(2745,1975) 2760,1975 v1(2760,2300)
RESET_5V: U1.13 U6.9 | length 822.4
  Top w8: U1.13 1775,1860 1775,1835 v1(1805,1805) ; v1(2405,1795) 2550,1795 U6.9@2551,1791.78
  Bottom w8: v1(1805,1805) 2395,1805 v1(2405,1795)
RESET_ISP: J4.5 R3.1 U1.29 | length 1496.5
  Top w8: J4.5 1460,2510 1505,2465 v1(1505,1970) ; v1(1800,1675) 1800,1550 U1.29 1805,1545 1805,1390 2030,1390 R3.1
  Bottom w8: v1(1505,1970) v1(1800,1675)
SCK: U4.11 U6.6 | length 302.2
  Top w8: U6.6@2603,2021.53 2605,2025 2605,2320 U4.11@2604,2323
SCK_5V: J4.3 U1.17 U6.7 | length 1907.4
  Top w8: U1.17 1635,1815 v1(1635,2265) ; v1(2570,2065) 2570,2030 2575,2025 U6.7
  Bottom w8: J4.3 1460,2410 1410,2360 1410,2275 1420,2265 v1(1635,2265) 2370,2265 v1(2570,2065)
VDD: C18.1 C19.1 C24.1 FB1.1 R2.2 U4.1 U4.9 U5.5 U6.1 | length 2938.1
  Top w8: C24.1@1646.02,2491 1650,2490 1765,2490 1768.07,2491 1770,2490 1820,2490 v1(1820,2475) ; U5.5@1888.15,2594 1890,2590 1905,2575 v1(1905,2525) ; FB1.1@2241,2795 2240,2790 2175,2725 2175,2520 C18.1@2220,2475 ; v1(2265,2480) 2220,2480 C18.1@2220,2475 ; v1(2400,2495) 2400,2490 2530,2490 U4.1@2535,2490 ; v1(2565,2285) 2565,2320 2565,2323 U4.9@2565,2325 ; v1(2725,2220) 2725,2030 2730,2025 2731,2021.53 2735,2020 2830,1925 2830,1815 2870,1775 2950,1775 2950,1845 2910,1885 R2.2@2908,1885.96 ; C18.1@2220,2475 2220,2470 2217,2470 C18.1@2220,2475
  Bottom w8: v1(1820,2475) 1860,2475 1905,2520 v1(1905,2525) 1950,2480 v1(2265,2480) 2385,2480 2388,2483 ; v1(2400,2495) 2388,2483 ; v1(2565,2285) 2590,2260 2680,2260 2683,2263 ; v1(2725,2220) 2683,2263 ; 2388,2483 2390,2480 2695,2480 2695,2275 2683,2263
VIN: BAT.1 C20.1 U3.1 U5.1 U5.3 | length 1436.4
  Top w8: v1(1530,2165) 1530,2665 U3.1 1530,2670 v1(1590,2730) ; v1(1780,2730) 1810,2700 1813.35,2697 1815,2695 1814.33,2684 1825,2670 1835,2660 1885,2660 1885,2695 1888.15,2697 1885,2700 1885,2890 1810,2965 C20.1@1806.26,2969
  Bottom w8: BAT.1 1365,2165 v1(1530,2165) ; v1(1590,2730) v1(1780,2730)
pads on no net: LED24.2-DOUT U1.30 U1.31 U4.7 U4.10 U4.15 U5.4 U6.11 U6.12 U6.13 U6.14 U6.15 U6.16 U$77.TESTPOINT Y2.2 Y2.4

## Keep-outs
Keep-Out Layer:
  lines w1: 954,2185 cw(c2185,2185) 3416,2185 cw(c2185,2185) 954,2185

## Silkscreen, mask and mechanical layers (free items; w line width, h text height)
Dimension:
  circle w1: c2185,2185 r1231

## Dimensions
2095,1705 to 2096.09,1573.11 on Bottom

## Text inside footprints (layer, text, board x,y; h text height)
C1: tNames ">NAME" at 2284,1472.91 h37.2 r270; tValues ">VALUE" at 2184,1472.91 h37.2 r270
C2: tNames ">NAME" at 2438,1499.19 h37.2 r270; tValues ">VALUE" at 2322,1499.19 h37.2 r270
C3: tNames ">NAME" at 2559,1470.32 h37.2 r270; tValues ">VALUE" at 2459,1470.32 h37.2 r270
C4: tNames ">NAME" at 1459.19,2781.14 h77.5 r235; tValues ">VALUE" at 1377.27,2838.5 h77.5 r235
C5: tNames ">NAME" at 2362,2561 h49.6 r270; tValues ">VALUE" at 2337,2561 h24.8 r270
C6: tNames ">NAME" at 2907.5,2355 h49.6 r180; tValues ">VALUE" at 2907.5,2439.5 h24.8 r180
C7: tNames ">NAME" at 1206.35,2294.32 h77.5 r75; tValues ">VALUE" at 1302.94,2268.44 h77.5 r75
C8: tNames ">NAME" at 1282.21,1940.03 h77.5 r285; tValues ">VALUE" at 1185.61,1914.15 h77.5 r285
C9: tNames ">NAME" at 1418.86,1543.35 h77.5 r135; tValues ">VALUE" at 1489.57,1614.06 h77.5 r135
C10: tNames ">NAME" at 1909.72,2558 h49.6 r180; tValues ">VALUE" at 1909.72,2583 h24.8 r180
C11: tNames ">NAME" at 2093.19,2563 h49.6 r180; tValues ">VALUE" at 2093.19,2588 h24.8 r180
C12: tNames ">NAME" at 2765,2887 h49.6 r90; tValues ">VALUE" at 2790,2887 h24.8 r90
C13: tNames ">NAME" at 2641,2908 h49.6 r90; tValues ">VALUE" at 2666,2908 h24.8 r90
C14: tNames ">NAME" at 1819.71,2246 h49.6; tValues ">VALUE" at 1819.71,2221 h24.8
C15: tNames ">NAME" at 1816.57,2161.5 h49.6; tValues ">VALUE" at 1816.57,2136.5 h24.8
C16: tNames ">NAME" at 2507,2563 h49.6 r270; tValues ">VALUE" at 2482,2563 h24.8 r270
C17: tNames ">NAME" at 2813,2633 h49.6; tValues ">VALUE" at 2813,2536.25 h24.8
C18: tNames ">NAME" at 2098.7,2475 h49.6 r180; tValues ">VALUE" at 2098.7,2500 h24.8 r180
C19: tNames ">NAME" at 1763.07,2374 h49.6 r270; tValues ">VALUE" at 1738.07,2374 h24.8 r270
C20: tNames ">NAME" at 1801.26,2852 h49.6 r270; tValues ">VALUE" at 1776.26,2852 h24.8 r270
C21: tNames ">NAME" at 2005.67,2930 h37.2; tValues ">VALUE" at 2005.67,2879.75 h24.8
C22: tNames ">NAME" at 2054.88,2858 h37.2 r180; tValues ">VALUE" at 2054.88,2908.25 h24.8 r180
C23: tNames ">NAME" at 2060.39,2824 h37.2 r180; tValues ">VALUE" at 2060.39,2874.25 h24.8 r180
C24: tNames ">NAME" at 1641.02,2374 h49.6 r270; tValues ">VALUE" at 1616.02,2374 h24.8 r270
C25: tNames ">NAME" at 2052.04,1236.49 h77.5 r355; tValues ">VALUE" at 2043.32,1136.87 h77.5 r355
C26: tNames ">NAME" at 2452.38,1271.18 h77.5 r15; tValues ">VALUE" at 2478.26,1174.59 h77.5 r15
C27: tNames ">NAME" at 1747.69,1296.52 h77.5 r150; tValues ">VALUE" at 1797.69,1383.12 h77.5 r150
C28: tNames ">NAME" at 2773.85,1439.03 h77.5 r30; tValues ">VALUE" at 2823.85,1352.43 h77.5 r30
C29: tNames ">NAME" at 2994.85,1679.79 h77.5 r60; tValues ">VALUE" at 3081.45,1629.79 h77.5 r60
C30: tNames ">NAME" at 3125,2110.39 h77.5 r90; tValues ">VALUE" at 3225,2110.39 h77.5 r90
C31: tNames ">NAME" at 3090.85,2492.85 h77.5 r120; tValues ">VALUE" at 3177.45,2542.85 h77.5 r120
C32: tNames ">NAME" at 2968,2734.64 h77.5 r135; tValues ">VALUE" at 3038.71,2805.36 h77.5 r135
C33: tNames ">NAME" at 2443.32,3130.62 h77.5 r345; tValues ">VALUE" at 2417.44,3034.03 h77.5 r345
C34: tNames ">NAME" at 2121.42,3175 h77.5; tValues ">VALUE" at 2121.42,3075 h77.5
C35: tNames ">NAME" at 2801.15,2911.85 h77.5 r150; tValues ">VALUE" at 2851.15,2998.45 h77.5 r150
C36: tNames ">NAME" at 2204.49,2011.18 h77.5 r180; tValues ">VALUE" at 2204.49,2111.18 h77.5 r180
FB1: tNames ">NAME" at 2246,2912 h49.6 r90; tValues ">VALUE" at 2271,2912 h24.8 r90
FRONT_LED: tNames ">NAME" at 1399.61,1665.46 h77.5 r90; tValues ">VALUE" at 1596.61,1668.46 h77.5 r90
J4: tNames ">NAME" at 1297.44,2263 h37.2 r90; tValues ">VALUE" at 1537.44,2263 h37.2 r90
L1: tNames ">NAME" at 2908.5,2489 h49.6 r180; tValues ">VALUE" at 2908.5,2573.5 h24.8 r180
L2: tNames ">NAME" at 2905.5,2421 h49.6 r180; tValues ">VALUE" at 2905.5,2505.5 h24.8 r180
L3: tNames ">NAME" at 2811,2764.5 h49.6 r90; tValues ">VALUE" at 2895.5,2764.5 h24.8 r90
L4: tNames ">NAME" at 2327,2778 h49.6 r90; tValues ">VALUE" at 2423.75,2778 h24.8 r90
L5: tNames ">NAME" at 2439,2875 h49.6; tValues ">VALUE" at 2439,2778.25 h24.8
LED1: tNames ">NAME" at 2323,3368 h49.6 r270
LED2: tNames ">NAME" at 2624.6,3292.14 h49.6 r255
LED3: tNames ">NAME" at 2896.01,3140.56 h49.6 r240
LED4: tNames ">NAME" at 3119.13,2923.97 h49.6 r225
LED5: tNames ">NAME" at 3278.56,2656.99 h49.6 r210
LED6: tNames ">NAME" at 3363.57,2358.01 h49.6 r195
LED7: tNames ">NAME" at 3368,2047 h49.6 r180
LED8: tNames ">NAME" at 3292.14,1745.52 h49.6 r165
LED9: tNames ">NAME" at 3140.56,1473.99 h49.6 r150
LED10: tNames ">NAME" at 2923.97,1250.91 h49.6 r135
LED11: tNames ">NAME" at 2656.99,1091.49 h49.6 r120
LED12: tNames ">NAME" at 2358.01,1006.59 h49.6 r105
LED13: tNames ">NAME" at 2047,1002 h49.6 r90
LED14: tNames ">NAME" at 1745.52,1078.03 h49.6 r75
LED15: tNames ">NAME" at 1473.99,1229.49 h49.6 r60
LED16: tNames ">NAME" at 1250.91,1446.07 h49.6 r45
LED17: tNames ">NAME" at 1091.49,1713.01 h49.6 r30
LED18: tNames ">NAME" at 1006.59,2012.12 h49.6 r15
LED19: tNames ">NAME" at 1002,2323 h49.6
LED20: tNames ">NAME" at 1078.03,2624.6 h49.6 r345
LED21: tNames ">NAME" at 1229.49,2896.01 h49.6 r330
LED22: tNames ">NAME" at 1446.07,3119.13 h49.6 r315
LED23: tNames ">NAME" at 1713.01,3278.56 h49.6 r300
LED24: tNames ">NAME" at 2012.12,3363.57 h49.6 r285
LED25: tNames ">NAME" at 2323,2248 h49.6 r270
R1: tNames ">NAME" at 2795.5,2712 h49.6; tValues ">VALUE" at 2795.5,2624 h24.8
R2: tNames ">NAME" at 2913,1928.56 h49.6 r90; tValues ">VALUE" at 2938,1928.56 h24.8 r90
R3: tNames ">NAME" at 2067.21,1382.72 h24.8 r270; tValues ">VALUE" at 1979.21,1392.72 h24.8 r270
R4: tNames ">NAME" at 1798.59,3070.05 h27.2 r25; tValues ">VALUE" at 1809.15,3047.39 h13.6 r25
R5: tNames ">NAME" at 2006.97,2113.86 h27.2; tValues ">VALUE" at 2006.97,2088.86 h13.6
U1: tNames ">NAME" at 1576.77,1574.96 h37.2 r90; tValues ">VALUE" at 2018.77,1567.96 h37.2 r90
U3: tNames ">NAME" at 1468.31,2893 h37.2; tValues ">VALUE" at 1788.31,2708 h37.2 r90
U4: tNames ">NAME" at 2534,2551 h49.6; tValues ">VALUE" at 2534,2281.16 h24.8
U5: tNames ">NAME" at 1772.75,2645 h49.6 r180; tValues ">VALUE" at 1772.75,2670 h24.8 r180
U6: tNames ">NAME" at 2755,1988.65 h49.6 r270; tValues ">VALUE" at 2518,1988.65 h24.8 r270
Y1: tNames ">NAME" at 2042.36,1604.4 h21.7 r90; tValues ">VALUE" at 2162.82,1604.4 h21.7 r90
Y2: tNames ">NAME" at 2601,2587.68 h49.6 r90; tValues ">VALUE" at 2737.16,2592.68 h24.8 r90
Y3: tNames ">NAME" at 2277.68,2620 h49.6 r180; tValues ">VALUE" at 2277.68,2755 h24.8 r180